# Altium PCB PCB1.PcbDoc
Units mm, origin at the board's own origin, x right, y up, seen from the top; angles counter-clockwise.
Board outline 26.42 x 16.33 mm, 2 copper layers (Top Layer, Bottom Layer); 7 components, 4 nets, 76 pads, 4 vias.
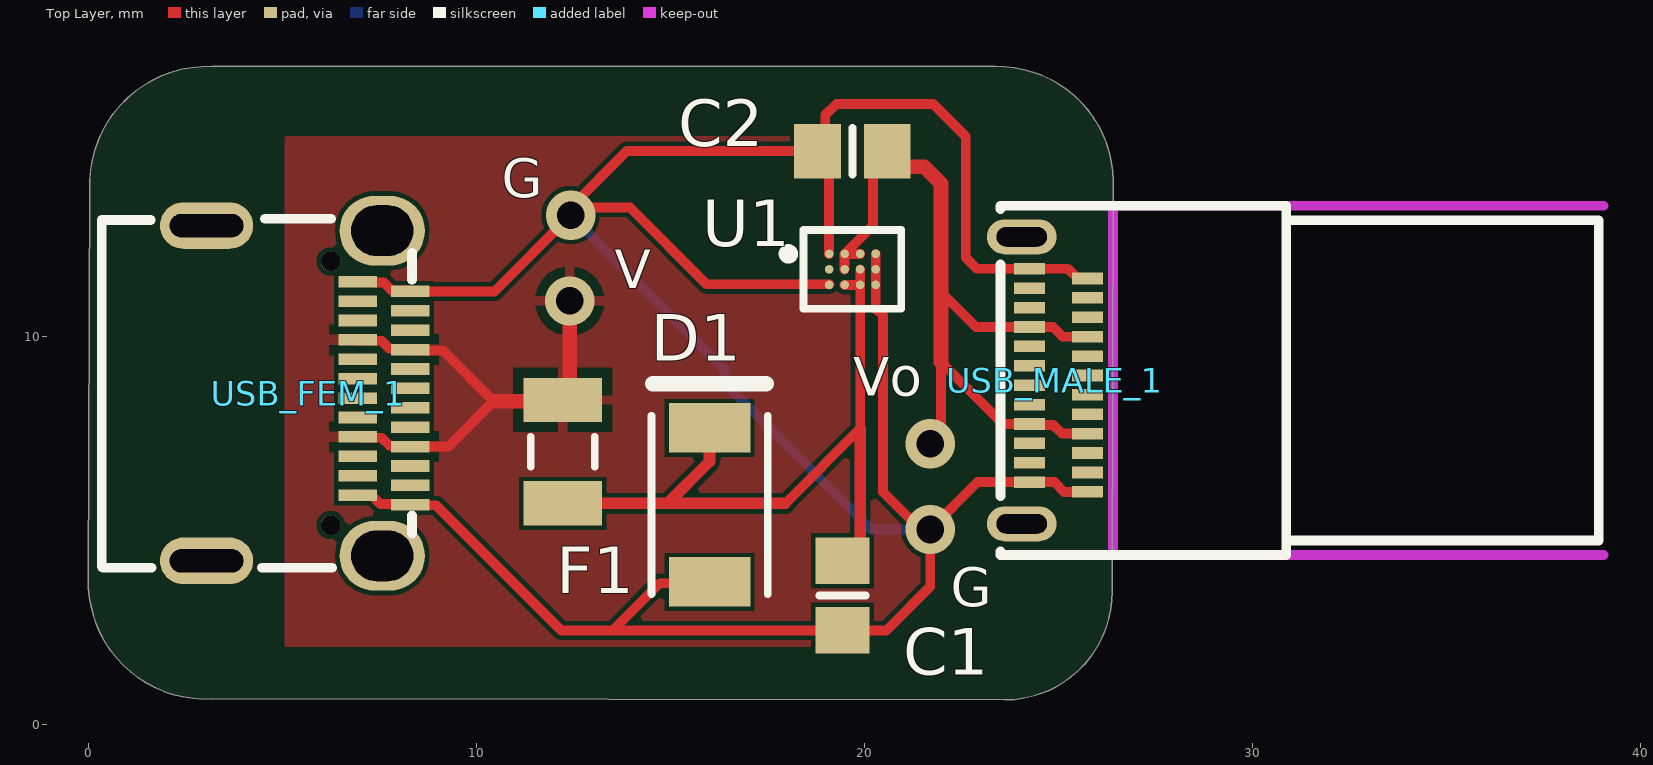
[diagram p0: Top Layer view]
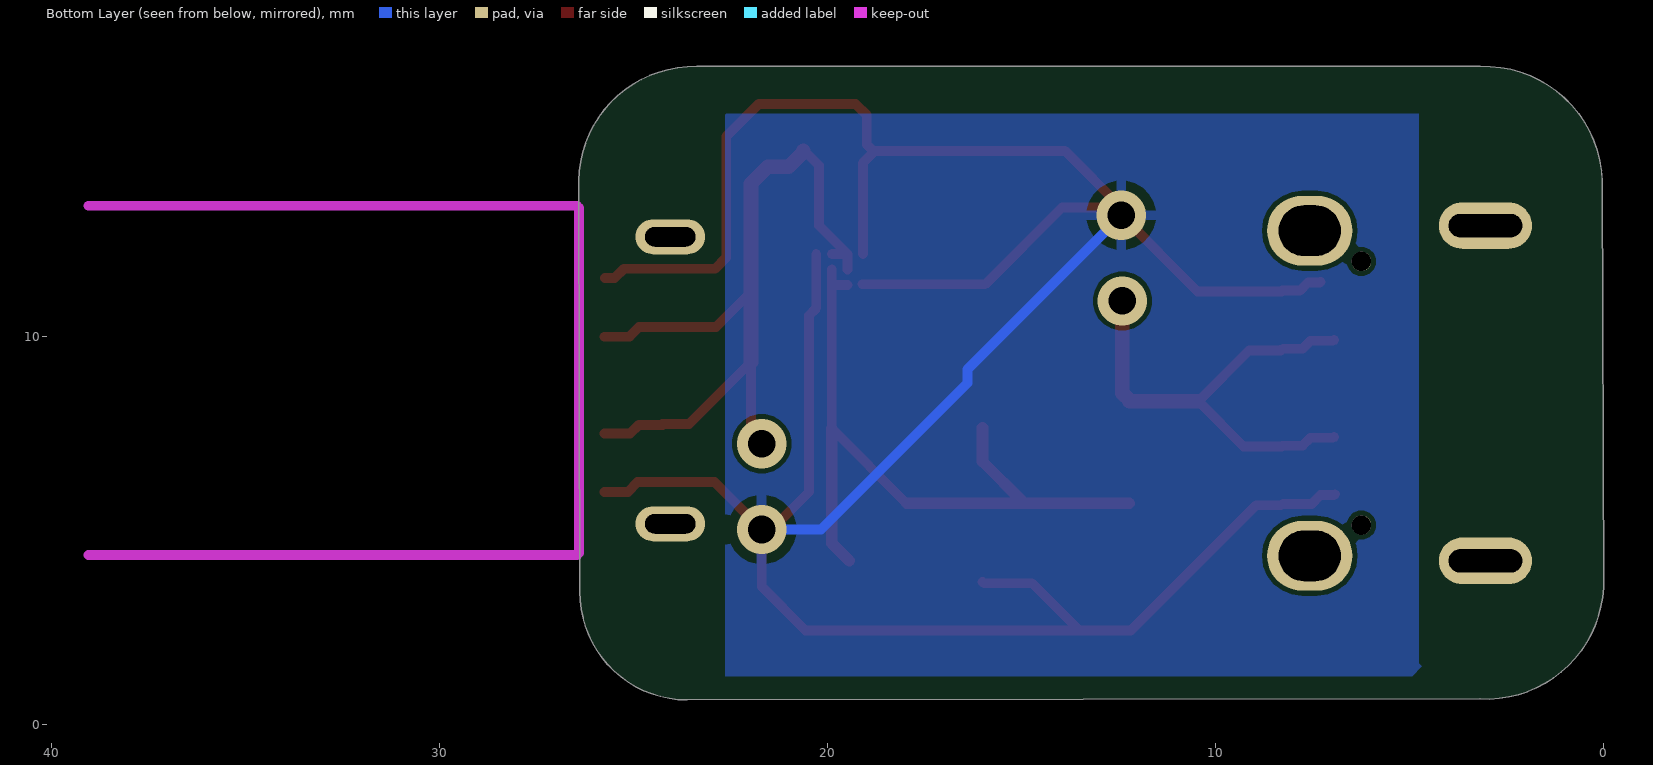
[diagram p1: Bottom Layer view, seen from below]

## Layer stack, top to bottom
Top Solder: solder mask 0.0102, Solder Resist, Dk 3.5
Top Layer: signal copper 0.0356
Dielectric 1: dielectric 0.32, FR-4, Dk 4.8
Bottom Layer: signal copper 0.0356
Bottom Solder: solder mask 0.0102, Solder Resist, Dk 3.5

## Board outline
-0.011,3.531 0.022,14.021 cw(c3.072,13.917) 3.175,16.967 23.368,16.967 cw(c23.417,13.972) 26.413,14.021 26.413,13.995 26.38,3.429 cw(c23.604,3.411) 23.622,0.635 3.175,0.66 cw(c3.017,3.688)

## Design rules (kind name [scope] priority, off if disabled: settings)
Clearance [All] p1: gap=0.12 ignorepadtopadclearanceinfootprint=FALSE except(0: Arc-Hole Track-Hole SMDPad-Hole THPad-Hole Via-Hole Fill-Hole Poly-Hole Region-Hole Text-Hole)
HoleToHoleClearance [All] p1: gap=0.127 allowstackedmicrovias=TRUE
MinimumSolderMaskSliver [All] p1: minsoldermaskwidth=0.076
PlaneClearance [All] p1: clearance=0.762
PolygonConnect [All] p1: connectstyle=Relief reliefconductorwidth=0.254 reliefentries=4 polygonreliefangle="90 Angle" airgapwidth=0.254
RoutingVias [All] p1: holewidth=0.711 width=1.27 viastyle="Through Hole" minholewidth=0.711 minwidth=1.27 maxholewidth=0.711 maxwidth=1.27
SilkToSilkClearance [All] p1: silktosilkclearance=0.127
SilkToSolderMaskClearance [IsPad] p1: minsilkscreentomaskgap=0.127 clearancetoexposedcopper=TRUE
SolderMaskExpansion [All] p1: expansion=0.102 istentingtop=FALSE
Width [All] p1: maxlimit=0.508 minlimit=0.254 preferedwidth=0.254
25 further rules are at their usual default settings.

## Components (designator, comment, footprint, x,y, rotation, side; value= is the part's Value field where it differs from the comment)
C1 "Cap" 6-0805_N 19.431,3.327 r90 top value=1uF
C2 "Cap" 6-0805_N 19.685,14.783 r0 top value=2.2uF
D1 "SMAJ5.0A" BOUR-SMA-2_V 16.002,5.664 r90 top
F1 "0466.200NRHF" FP-0466-MFG 12.217,7.036 r270 top
U1 "TPD1S414YZR" FP-YZ0012-C02-MFG 19.685,11.735 r0 top
USB_FEM_1 "U262-241N-4BV64" usbc-female 5.287,-10.191 r270 top
USB_MALE_1 "GT-USB-8012A" PCBComponent_1 30.922,8.693 r90 top

## Footprints (in the part's own frame and the unit in brackets; to place one, negate y for a bottom-side part, rotate by r counter-clockwise, add the part's x,y. Pads: shape width x height; smd on the part's side, far side on the other; paste and mask are expansions set on the pad)
6-0805_N [mm] "Chip Resistor, Body 2.0x1.2mm, IPC Medium Density"
  rect 1.2x1.4 smd: 1(-0.9,0) 2(0.9,0)
  silkscreen extent 0,-0.6 0,0.6, body extent -1.07,-0.7 1.07,0.7, height 0.7
BOUR-SMA-2_V [mm] "SMA, 2-Leads, Body 4.57x2.92mm"
  rect 1.27x2.1 smd: 1(-1.985,0) 2(1.985,0)
  silkscreen extent -2.3,-1.5 3.12,1.5, body extent -2.5,-1.46 2.5,1.46, height 2.62
FP-0466-MFG [mil]
  rect 45x80 smd paste+0 mask+0: 1(-52.5,0) 2(52.5,0)
  silkscreen extent -15,-32 15,32, body extent -79,-44 79,44, height 10
FP-YZ0012-C02-MFG [mm]
  round 0.225 smd paste-1000 mask-1000: A1(-0.6,0.4) A2(-0.2,0.4) A3(0.2,0.4) A4(0.6,0.4) B1(-0.6,0) B2(-0.2,0) B3(0.2,0) B4(0.6,0) C1(-0.6,-0.4) C2(-0.2,-0.4) C3(0.2,-0.4) C4(0.6,-0.4)
  silkscreen extent -1.77,-1.01 1.26,1.01, body extent -1.46,-1.21 1.46,1.21, height 0.25
PCBComponent_1 [mm]
  oval 0.9x1.8 hole 0.5 slot 1.3 at 90 deg: 2(-3.518,6.872) 3(3.882,6.872)
  rect 0.3x0.8 smd: A1(-2.443,6.672) A2(-1.943,6.672) A3(-1.443,6.672) A4(-0.943,6.672) A5(-0.443,6.672) A6(0.057,6.672) A7(0.557,6.672) A8(1.057,6.672) A9(1.557,6.672) A10(2.057,6.672) A11(2.557,6.672) A12(3.057,6.672) B1(2.807,5.172) B2(2.307,5.172) B3(1.807,5.172) B4(1.307,5.172) B5(0.807,5.172) B6(0.307,5.172) B7(-0.193,5.172) B8(-0.693,5.172) B9(-1.193,5.172) B10(-1.693,5.172) B11(-2.193,5.172) B12(-2.693,5.172)
  Keep-Out Layer lines w0.254: -4.268,4.522 4.632,4.522 ; -4.318,4.472 -4.318,-8.128 ; 4.682,4.472 4.682,-8.128
  silkscreen extent -4.32,-8 4.68,7.42
usbc-female [mm]
  oval 1.8x2.2 hole 1.3 slot 1.6 at 90 deg: 1(-22.924,2.277) 4(-14.542,2.277)
  oval 1.2x2.4 hole 0.6 slot 1.9 at 90 deg: 2(-23.053,-2.253) 3(-14.413,-2.253)
  rect 0.3x1 smd: A1(-21.358,2.997) A2(-20.858,2.997) A3(-20.358,2.997) A4(-19.858,2.997) A5(-19.358,2.997) A6(-18.858,2.997) A7(-18.358,2.997) A8(-17.858,2.997) A9(-17.358,2.997) A10(-16.858,2.997) A11(-16.358,2.997) A12(-15.858,2.997) B1(-16.108,1.647) B2(-16.608,1.647) B3(-17.108,1.647) B4(-17.608,1.647) B5(-18.108,1.647) B6(-18.608,1.647) B7(-19.108,1.647) B8(-19.608,1.647) B9(-20.108,1.647) B10(-20.608,1.647) B11(-21.108,1.647) B12(-21.608,1.647)
  round 0.5 hole 0.5 unplated: ""(-22.133,0.947) ""(-15.333,0.947)
  silkscreen extent -23.23,-4.95 -14.23,3.05

## Part data
C1: "0805B105K500NT", LatestRevisionDate=17-Jul-2002, LatestRevisionNote="Re-released for DXP Platform.", PackageDescription="Radial Cap, Thru-Hole; 2 Leads; 0.3 in Pin Spacing", PackageReference=RAD-0.3, Published=8-Jun-2000, Publisher="Altium Limited"
C2: "0805F225M500NT", LatestRevisionDate=17-Jul-2002, LatestRevisionNote="Re-released for DXP Platform.", PackageDescription="Radial Cap, Thru-Hole; 2 Leads; 0.3 in Pin Spacing", PackageReference=RAD-0.3, Published=8-Jun-2000, Publisher="Altium Limited"
D1: library part CMP-2000-07090-1, "SMAJ Transient Voltage Suppressor Diode Series, 3.5 V, -55 to 150 degC, 2-Pin SMA, RoHS, Tape and Reel", Capacitance @ Frequency=-, Current - Peak Pulse (10/1000µs)=43.5A, Manufacturer=Bourns, Operating Temperature=-55°C~150°C(TJ), Package / Case=DO-214AC,SMA, Package Description="2-Pin Surface Mount Device, Body 4.315 x 2.605 mm", Package Reference=SMA-2, Power - Peak Pulse=400W, Power Line Protection=No, Standard Package=1, Supplier Device Package=SMA(DO-214AC), Voltage - Breakdown (Min)=6.4V, Voltage - Clamping (Max) @ Ipp=9.2V, Voltage - Reverse Standoff (Typ)=5V, Applications=GeneralPurpose, Bidirectional Channels=-, Catalog Drawings=SMAJSeriesFootprintSMAJ,SMBJSeries, Category=CircuitProtection, Datasheet URL=https://datasheet.ciiva.com/25624/0900766b8112213b-25624680.pdf, Datasheet Version=08/2012, EDA / CAD Models=DownloadfromAcceleratedDesigns, Family=TVS-Diodes, Featured Product=SMAJ/SMBJ/SMCJ/SMLJDiscreteTVSDiodes, Manufacturer URL=http://www.bourns.com/, Mounting Technology=SurfaceMount, Mounting Type=SurfaceMount, Online Catalog=SMAJSeries, Other Names=SMAJ5.0ABDKR, Packaging=Digi-Reel®, RoHS Information=SMAJSeriesMaterialDeclaration, Series=SMAJ, Type=Zener, Unidirectional Channels=1
F1: library part CMP-08605-000096-1, "FUSE BOARD MNT 200MA 125VAC/VDC", Case Code (Imperial)=1206, Case Code (Metric)=3216, Case/Package=SMD/SMT, Current=200mA, DC Cold Resistance=1.16R, Max Operating Temperature=90°C, Min Operating Temperature=-55°C, Package Quantity=5000, Power Dissipation=50.9mW, Voltage Rating (AC)=125V, Approvals=UL, Current Rating=200mA, Depth=1.52mm, Fuse Type="Board Mount (Cartridge Style Excluded)", Height=0.023inch, Housing Material=Ceramic, Lead Free="Contains Lead", Length=3.18mm, Mount="Surface Mount", Number of Pins=2, Packaging="Tape and Reel", Radiation Hardening=No, RoHS Compliant=Yes, Series="SlimLine™ 466", Voltage Rating (DC)=125V, Width=0.06inch
U1: library part CMP-04910-000132-1, "IC PWR SWITCH N-CHAN 1:1 12DSBGA", Input Current=3.5A, Max Operating Temperature=85°C, Min Operating Temperature=-40°C, Operating Supply Voltage=30V, Package Quantity=3000, Fault Protection="Over Temperature", Interface=USB, Lead Free="Lead Free", Number of Channels=1, Number of Outputs=1, Number of Pins=12, Operating Supply Current=3.5A, Output Configuration="High Side", Packaging="Tape and Reel", Radiation Hardening=No, RoHS Compliant=Yes
USB_FEM_1: "Female USB-TYPE-C", BOM_JLCPCB Part Class="Extended Part", BOM_Manufacturer="XKB Enterprise", BOM_Manufacturer Part=U262-241N-4BV64, BOM_Supplier=LCSC, BOM_Supplier Part=C388660, Contributor=LCSC, spicePre=U, spiceSymbolName=U262-241N-4BV64
USB_MALE_1: "MALE-USB-TYPE-C", BOM_JLCPCB Part Class="Extended Part", BOM_Manufacturer=G-Switch(品赞), BOM_Manufacturer Part=GT-USB-8012A, BOM_Supplier=LCSC, BOM_Supplier Part=C2982483, Contributor=lcsc, link=https://atta.szlcsc.com/upload/public/pdf/source/20220429/9F8815E2CFA8FB68F0FB0689B355DC71.pdf, spicePre=U, spiceSymbolName=GT-USB-8012A

## Via types
v1: diameter 1.27, hole 0.711, Top Layer to Bottom Layer, 4 vias

## Nets (pads, with @x,y where several pads share a name; then routed paths per layer and width w, separated by ;. In a path a pad name is that pad's centre, name@x,y a point inside that pad or via, vN(x,y) a via of type N, cw(c..) or ccw(c..) an arc to the next point about the centre after c; other vN are vias at no path point)
GND: C1.1 C2.1 D1.1 U1.A1 U1.A4 U1.B4 U1.C1 U1.C4 USB_FEM_1.A1 USB_FEM_1.A12 USB_FEM_1.B1 USB_FEM_1.B12 USB_MALE_1.A1 USB_MALE_1.A12 USB_MALE_1.B1 USB_MALE_1.B12 | length 81.7
  Top Layer w0.254: USB_FEM_1.B1@6.911,5.94 USB_FEM_1.B1 7.284,5.917 7.511,5.69 8.261,5.69 8.298,5.653 8.952,5.653 12.178,2.427 13.502,2.427 ; USB_FEM_1.B12@7.284,11.417 7.307,11.394 7.606,11.394 7.81,11.19 USB_FEM_1.A1@8.284,11.19 ; USB_FEM_1.A1 10.456,11.167 v1(12.421,13.132) ; D1.1 15.968,3.645 14.72,3.645 13.502,2.427 ; C2.1 13.868,14.783 12.421,13.335 v1(12.421,13.132) ; U1.A1 19.085,14.483 18.799,14.768 18.985,14.954 18.985,15.715 19.272,16.002 21.768,16.002 22.606,15.164 22.606,12.04 22.896,11.75 USB_MALE_1.A12 25.25,11.75 25.483,11.517 USB_MALE_1.B1@25.733,11.517 ; U1.C1@19.101,11.35 15.93,11.35 13.953,13.326 12.615,13.326 v1(12.421,13.132) ; U1.A4 U1.B4 U1.C4 20.285,10.734 20.472,10.547 20.472,5.994 21.438,5.029 v1(21.692,5.029) ; USB_MALE_1.B12 25.14,6 24.89,6.25 USB_MALE_1.A1 22.912,6.25 v1(21.692,5.029) ; 13.502,2.427 C1.1 20.563,2.427 21.692,3.556 v1(21.692,5.029)
  Bottom Layer w0.254: v1(12.421,13.132) 16.391,9.161 16.391,8.805 20.168,5.029 v1(21.692,5.029)
NetC1_2: C1.2 D1.2 F1.2 U1.B3 U1.C2 U1.C3 | length 19
  Top Layer w0.254: 17.956,5.702 19.885,7.631 U1.C3 ; U1.C2 U1.C3 ; U1.B3 U1.C3
  Top Layer w0.3: F1.2 14.922,5.702 ; D1.2 16.002,6.782 14.922,5.702 ; 17.956,5.702 14.922,5.702 ; C1.2 19.435,4.227 19.885,4.677 19.885,7.631
VIN: F1.1 USB_FEM_1.A4 USB_FEM_1.A9 USB_FEM_1.B4 USB_FEM_1.B9 | length 12.6
  Top Layer w0.254: USB_FEM_1.B4 6.957,7.394 7.548,7.394 7.752,7.19 USB_FEM_1.A9@8.284,7.19 ; USB_FEM_1.B9 6.957,9.894 7.548,9.894 7.752,9.69 8.261,9.69 USB_FEM_1.A4 8.307,9.644 9.127,9.644 10.436,8.335 9.267,7.167 USB_FEM_1.A9
  Top Layer w0.381: 10.436,8.335 F1.1@12.217,8.335 ; F1.1 12.395,8.547 v1(12.395,10.922)
VO: C2.2 U1.A2 U1.A3 U1.B2 USB_MALE_1.A4 USB_MALE_1.A9 USB_MALE_1.B4 USB_MALE_1.B9 | length 21.2
  Top Layer w0.254: U1.B2 U1.A2 ; U1.A3 U1.A2 ; C2.2 20.218,14.416 20.218,12.868 U1.A2 ; v1(21.692,7.239) 21.692,7.514 21.968,7.79 21.968,9.344 ; 21.971,9.347 23.568,7.75 USB_MALE_1.A4 ; 21.971,11.151 22.872,10.25 USB_MALE_1.A9 24.853,10.25 25.103,10 USB_MALE_1.B4 ; USB_MALE_1.A4@24.25,7.727 24.861,7.727 25.088,7.5 USB_MALE_1.B9
  Top Layer w0.381: C2.2@20.623,14.792 20.623,14.755 20.995,14.384 21.532,14.384 21.971,13.945 21.971,11.151 21.971,9.347
pads on no net: U1.B1 USB_FEM_1. USB_FEM_1.1 USB_FEM_1.2 USB_FEM_1.3 USB_FEM_1.4 USB_FEM_1.A2 USB_FEM_1.A3 USB_FEM_1.A5 USB_FEM_1.A6 USB_FEM_1.A7 USB_FEM_1.A8 USB_FEM_1.A10 USB_FEM_1.A11 USB_FEM_1.B2 USB_FEM_1.B3 USB_FEM_1.B5 USB_FEM_1.B6 USB_FEM_1.B7 USB_FEM_1.B8 USB_FEM_1.B10 USB_FEM_1.B11 USB_MALE_1.2 USB_MALE_1.3 USB_MALE_1.A2 USB_MALE_1.A3 USB_MALE_1.A5 USB_MALE_1.A6 USB_MALE_1.A7 USB_MALE_1.A8 USB_MALE_1.A10 USB_MALE_1.A11 USB_MALE_1.B2 USB_MALE_1.B3 USB_MALE_1.B5 USB_MALE_1.B6 USB_MALE_1.B7 USB_MALE_1.B8 USB_MALE_1.B10 USB_MALE_1.B11

## Polygon pours and split planes (outlines as drawn)
VIN on Top Layer "VIN_L01_P000" (solid, remove dead copper, pour order 0): 5.055,15.215 5.105,15.164 22.098,15.164 22.098,2.184 21.92,2.007 5.055,2.007
GND on Bottom Layer "GND_L02_P002" (solid, remove dead copper, pour order 2): 4.75,15.748 4.75,1.575 4.674,1.499 4.928,1.245 22.631,1.245 22.631,15.723 22.606,15.748

## Silkscreen, mask and mechanical layers (free items; w line width, h text height)
Top Overlay:
  text "G" at 10.643,13.589 h1
  text "V" at 13.564,11.252 h1
  text "Vo" at 19.71,8.484 h1
  text "G" at 22.225,3.048 h1
Mechanical 1:
  lines w0.254: 26.413,13.995 26.38,3.429 cw(c23.604,3.411) 23.622,0.635 3.175,0.66 cw(c3.017,3.688) -0.011,3.531 0.022,14.021 cw(c3.072,13.917) 3.175,16.967 23.368,16.967 cw(c23.417,13.972) 26.413,14.021